# Altium PCB Trigger.PcbDoc (part 2 of 3)
Units mil, origin at the board's own origin, x right, y up, seen from the top; angles counter-clockwise.
Board outline 9937 x 6299 mil, 4 copper layers (TopLayer, MidLayer1, MidLayer2, BottomLayer); 197 components, 279 nets, 1978 pads, 340 vias.
Unrouted connection lines stored in the file: 59.
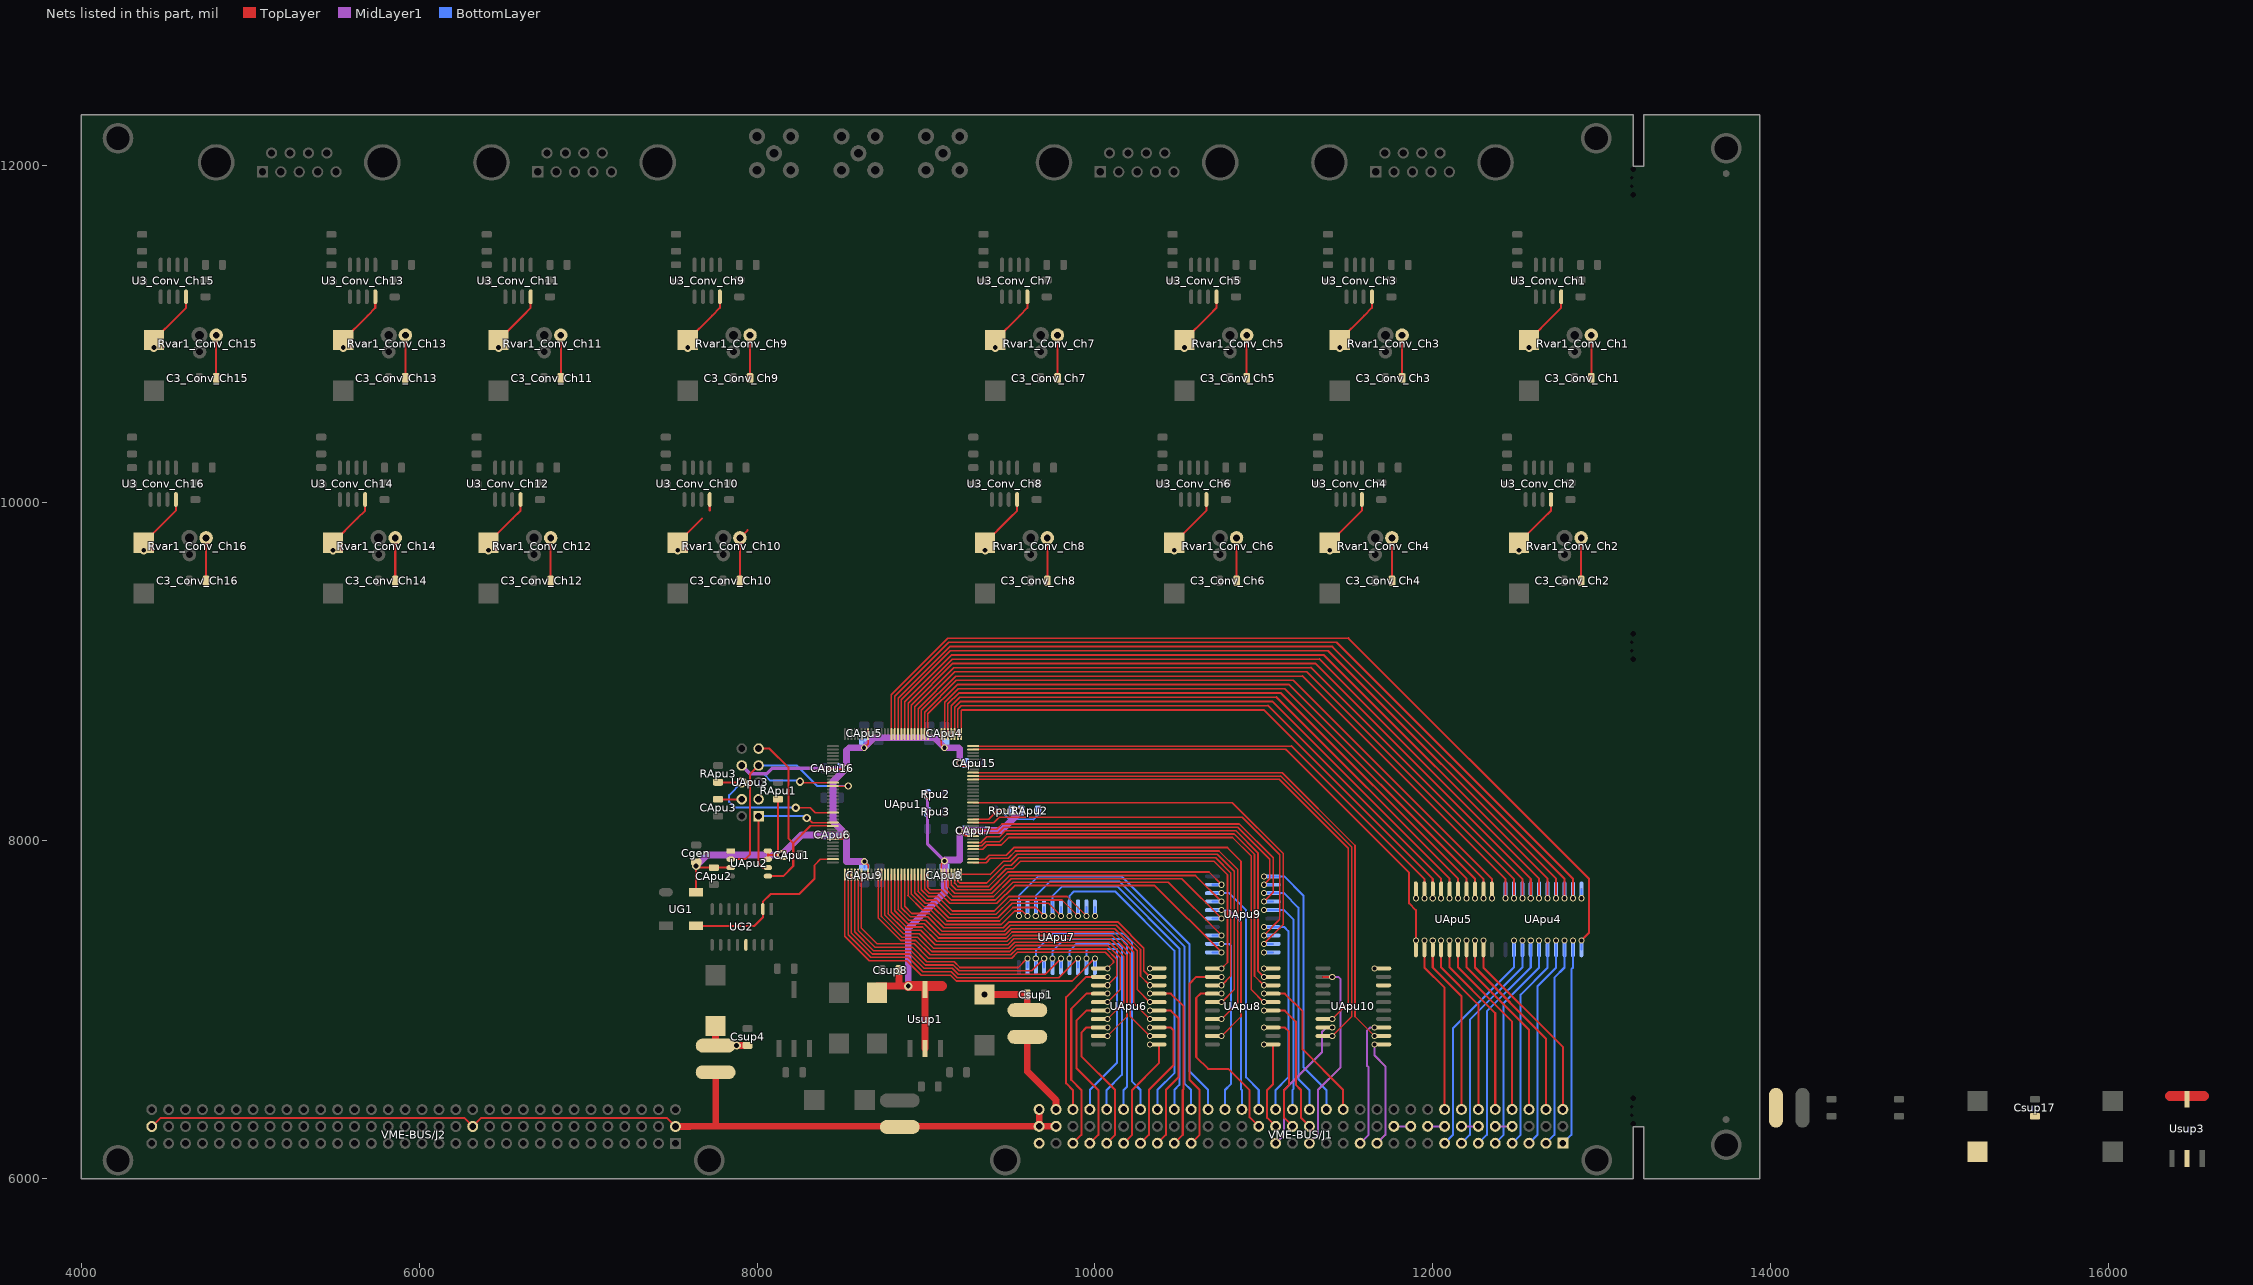
[diagram p4: the nets of this part, all layers, seen from the top]

## Via types
v1: diameter 36, hole 24, TopLayer to BottomLayer, 142 vias
v2: diameter 46, hole 32, TopLayer to BottomLayer, 64 vias
v3: diameter 50, hole 28, TopLayer to BottomLayer, 53 vias
v4: diameter 80, hole 48, TopLayer to BottomLayer, 27 vias
v5: diameter 56, hole 32, TopLayer to BottomLayer, 25 vias
v6: diameter 40, hole 24, TopLayer to BottomLayer, 18 vias
v7: diameter 64, hole 40, TopLayer to BottomLayer, 8 vias
v8: diameter 42, hole 28, TopLayer to BottomLayer, 2 vias
v9: diameter 54, hole 36, TopLayer to BottomLayer, 1 vias

## Nets (pads, with @x,y where several pads share a name; then routed paths per layer and width w, separated by ;. In a path a pad name is that pad's centre, name@x,y a point inside that pad or via, vN(x,y) a via of type N, cw(c..) or ccw(c..) an arc to the next point about the centre after c; other vN are vias at no path point) (continued)
"+3.3 V": C3_Conv_Ch1.2 C3_Conv_Ch2.2 C3_Conv_Ch3.2 C3_Conv_Ch4.2 C3_Conv_Ch5.2 C3_Conv_Ch6.2 C3_Conv_Ch7.2 C3_Conv_Ch8.2 C3_Conv_Ch9.2 C3_Conv_Ch10.2 C3_Conv_Ch11.2 C3_Conv_Ch12.2 C3_Conv_Ch13.2 C3_Conv_Ch14.2 C3_Conv_Ch15.2 C3_Conv_Ch16.2 C4_Conv_Ch1.+ C4_Conv_Ch2.+ C4_Conv_Ch3.+ C4_Conv_Ch4.+ C4_Conv_Ch5.+ C4_Conv_Ch6.+ C4_Conv_Ch7.+ C4_Conv_Ch8.+ C4_Conv_Ch9.+ C4_Conv_Ch10.+ C4_Conv_Ch11.+ C4_Conv_Ch12.+ C4_Conv_Ch13.+ C4_Conv_Ch14.+ C4_Conv_Ch15.+ C4_Conv_Ch16.+ Csup16.+ Csup17.1 Rvar1_Conv_Ch1.2 Rvar1_Conv_Ch2.2 Rvar1_Conv_Ch3.2 Rvar1_Conv_Ch4.2 Rvar1_Conv_Ch5.2 Rvar1_Conv_Ch6.2 Rvar1_Conv_Ch7.2 Rvar1_Conv_Ch8.2 Rvar1_Conv_Ch9.2 Rvar1_Conv_Ch10.2 Rvar1_Conv_Ch11.2 Rvar1_Conv_Ch12.2 Rvar1_Conv_Ch13.2 Rvar1_Conv_Ch14.2 Rvar1_Conv_Ch15.2 Rvar1_Conv_Ch16.2 U3_Conv_Ch1.8 U3_Conv_Ch2.8 U3_Conv_Ch3.8 U3_Conv_Ch4.8 U3_Conv_Ch5.8 U3_Conv_Ch6.8 U3_Conv_Ch7.8 U3_Conv_Ch8.8 U3_Conv_Ch9.8 U3_Conv_Ch10.8 U3_Conv_Ch11.8 U3_Conv_Ch12.8 U3_Conv_Ch13.8 U3_Conv_Ch14.8 U3_Conv_Ch15.8 U3_Conv_Ch16.8 Usup3.2 Usup3.4 | length 9391
  TopLayer w12: C4_Conv_Ch16.+@4370,9764.49 4514.49,9908.98 4560,9954.49 U3_Conv_Ch16.8@4560,10020.51 ; C4_Conv_Ch15.+@4430,10964.49 4574.49,11108.98 4620,11154.49 U3_Conv_Ch15.8@4620,11220.51 ; C3_Conv_Ch16.2@4738.43,9539.45 C3_Conv_Ch16.2@4738.43,9559.45 4738.43,9639.45 Rvar1_Conv_Ch16.2@4738.43,9792.91 ; C3_Conv_Ch15.2@4798.43,10739.45 C3_Conv_Ch15.2@4798.43,10759.45 4798.43,10839.45 Rvar1_Conv_Ch15.2@4798.43,10992.91 ; C4_Conv_Ch14.+@5490,9764.49 5634.49,9908.98 5680,9954.49 U3_Conv_Ch14.8@5680,10020.51 ; C4_Conv_Ch13.+@5550,10964.49 5694.49,11108.98 5740,11154.49 U3_Conv_Ch13.8@5740,11220.51 ; C3_Conv_Ch14.2@5858.43,9539.45 C3_Conv_Ch14.2@5858.43,9559.45 5858.43,9639.45 Rvar1_Conv_Ch14.2@5858.43,9792.91 ; C3_Conv_Ch13.2@5918.43,10739.45 C3_Conv_Ch13.2@5918.43,10759.45 5918.43,10839.45 Rvar1_Conv_Ch13.2@5918.43,10992.91 ; C4_Conv_Ch12.+@6410,9764.49 6554.49,9908.98 6600,9954.49 U3_Conv_Ch12.8@6600,10020.51 ; C4_Conv_Ch11.+@6470,10964.49 6614.49,11108.98 6660,11154.49 U3_Conv_Ch11.8@6660,11220.51 ; C3_Conv_Ch12.2@6778.43,9539.45 C3_Conv_Ch12.2@6778.43,9559.45 6778.43,9639.45 Rvar1_Conv_Ch12.2@6778.43,9792.91 ; C3_Conv_Ch11.2@6838.43,10739.45 C3_Conv_Ch11.2@6838.43,10759.45 6838.43,10839.45 Rvar1_Conv_Ch11.2@6838.43,10992.91 ; C4_Conv_Ch10.+@7530,9764.49 7674.49,9908.98 ; C4_Conv_Ch9.+@7590,10964.49 7734.49,11108.98 7780,11154.49 U3_Conv_Ch9.8@7780,11220.51 ; 7720,9954.49 U3_Conv_Ch10.8@7720,10020.51 ; C3_Conv_Ch10.2@7898.43,9539.45 C3_Conv_Ch10.2@7898.43,9559.45 7898.43,9639.45 Rvar1_Conv_Ch10.2@7898.43,9792.91 7943.94,9838.43 ; C3_Conv_Ch9.2@7958.43,10739.45 C3_Conv_Ch9.2@7958.43,10759.45 7958.43,10839.45 Rvar1_Conv_Ch9.2@7958.43,10992.91 ; C4_Conv_Ch8.+@9350,9764.49 9494.49,9908.98 9540,9954.49 U3_Conv_Ch8.8@9540,10020.51 ; C4_Conv_Ch7.+@9410,10964.49 9554.49,11108.98 9600,11154.49 U3_Conv_Ch7.8@9600,11220.51 ; C3_Conv_Ch8.2@9718.43,9539.45 C3_Conv_Ch8.2@9718.43,9559.45 9718.43,9639.45 Rvar1_Conv_Ch8.2@9718.43,9792.91 ; C3_Conv_Ch7.2@9778.43,10739.45 C3_Conv_Ch7.2@9778.43,10759.45 9778.43,10839.45 Rvar1_Conv_Ch7.2@9778.43,10992.91 ; C4_Conv_Ch6.+@10470,9764.49 10614.49,9908.98 10660,9954.49 U3_Conv_Ch6.8@10660,10020.51 ; C4_Conv_Ch5.+@10530,10964.49 10674.49,11108.98 10720,11154.49 U3_Conv_Ch5.8@10720,11220.51 ; C3_Conv_Ch6.2@10838.43,9539.45 C3_Conv_Ch6.2@10838.43,9559.45 10838.43,9639.45 Rvar1_Conv_Ch6.2@10838.43,9792.91 ; C3_Conv_Ch5.2@10898.43,10739.45 C3_Conv_Ch5.2@10898.43,10759.45 10898.43,10839.45 Rvar1_Conv_Ch5.2@10898.43,10992.91 ; C4_Conv_Ch4.+@11390,9764.49 11534.49,9908.98 11580,9954.49 U3_Conv_Ch4.8@11580,10020.51 ; C4_Conv_Ch3.+@11450,10964.49 11594.49,11108.98 11640,11154.49 U3_Conv_Ch3.8@11640,11220.51 ; C3_Conv_Ch4.2@11758.43,9539.45 C3_Conv_Ch4.2@11758.43,9559.45 11758.43,9639.45 Rvar1_Conv_Ch4.2@11758.43,9792.91 ; C3_Conv_Ch3.2@11818.43,10739.45 C3_Conv_Ch3.2@11818.43,10759.45 11818.43,10839.45 Rvar1_Conv_Ch3.2@11818.43,10992.91 ; C4_Conv_Ch2.+@12510,9764.49 12654.49,9908.98 12700,9954.49 U3_Conv_Ch2.8@12700,10020.51 ; C4_Conv_Ch1.+@12570,10964.49 12714.49,11108.98 12760,11154.49 U3_Conv_Ch1.8@12760,11220.51 ; C3_Conv_Ch2.2@12878.43,9539.45 C3_Conv_Ch2.2@12878.43,9559.45 12878.43,9639.45 Rvar1_Conv_Ch2.2@12878.43,9792.91 ; C3_Conv_Ch1.2@12938.43,10759.45 12938.43,10839.45 Rvar1_Conv_Ch1.2@12938.43,10992.91
  other v3: 4370,9720 5490,9720 6410,9720 7530,9720 9350,9720 10470,9720 11390,9720 12510,9720 4430,10920 5550,10920 6470,10920 7590,10920 9410,10920 10530,10920 11450,10920 12570,10920
"+3.3 VDIG": CApu1.2 CApu2.2 CApu3.1 CApu4.2 CApu5.2 CApu6.2 CApu7.2 CApu8.2 CApu9.2 CApu15.2 CApu16.2 Cgen.2 Csup7.+ Csup8.1 RApu1.1 RApu2.1 Rpu1.1 Rpu2.1 Rpu3.1 UApu1.8 UApu1.29 UApu1.44 UApu1.66 UApu1.81 UApu1.102 UApu1.115 UApu1.137 UApu2.3 UApu2.7 UApu2.8 UApu3.4 UG1.4 UG2.13 Usup1.2 Usup1.4 | length 7890.9
  TopLayer w8: UApu1.29@8448.94,8009.33 8504.33,8009.33 v6(8530,8035) ; UApu1.8@8448.94,8422.72 v6@8522.72,8422.72 ; v6(8634.29,8551.02) 8657.6,8574.33 UApu1.137@8657.6,8631.38 ; v6(8635.1,7878.17) 8657.6,7855.67 UApu1.44@8657.6,7800.67 ; UApu1.66@9090.67,7800.67 9090.67,7862.4 v6(9109.29,7881.02) ; UApu1.115@9090.67,8631.38 9090.67,8569.65 v6(9109.29,8551.02) ; v6(9199.29,8061.02) 9231.3,8029.02 UApu1.81@9279.65,8029.02 ; v6(9200,8460) 9217.6,8442.4 UApu1.102@9279.65,8442.4
  TopLayer w12: Cgen.2@7629.29,7861.02 v3(7639.29,7851.02) v3@7640,7850.31 ; UG1.4@7640,7696.02 v3@7640,7850.31 ; v3@7640,7851.02 v3@7640,7850.31 ; CApu3.1@7769.29,8246.02 UApu3.4@7909.29,8246.02 ; UApu2.3@7844.29,7841.02 CApu2.2@7744.29,7841.02 CApu2.2@7724.29,7841.02 7649.29,7841.02 v3@7640,7850.31 ; UApu2.7@8064.29,7891.02 8064.29,7916.02 ; UApu2.8@8064.29,7941.02 8064.29,7916.02 ; RApu1.1@8124.29,8246.02 RApu1.1@8124.29,8236.02 8124.29,7936.02 v3(8144.29,7916.02) 8064.29,7916.02
  TopLayer w40: Csup7.+@8710,7140 8840,7140 ; Csup8.1@8840,7235 Csup8.1@8840,7215 8840,7140 ; v3(8895,7140) 8840,7140 ; Usup1.2@8995,6770 Usup1.4@8995,7120
  MidLayer1 w20: 7909.29,8446.02 7958.29,8397.02 8057.02,8397.02 8090,8430 v6(8530,8430) ; v6(9009.29,8265) 9009.29,7981.02 v6(9109.29,7881.02)
  MidLayer1 w40: v3(7639.29,7851.02) 7704.29,7916.02 v3(8144.29,7916.02) 8263.27,8035 v6(8530,8035) ; v6(8635.1,7878.17) 8530,7878.17 v6(8530,8035) ; v3(8895,7140) 8895,7480 9109.29,7694.29 v6(9109.29,7881.02) ; v6@9109.13,8550.87 9194.13,8550.87 9200,8545 v6(9200,8460) ; v6(9109.29,8551.02) 9050.31,8610 8693.27,8610 v6(8634.29,8551.02) 8546.02,8551.02 8530,8535 v6(8530,8430) 8450,8350 8450,8115 v6(8530,8035) ; v6@9114.69,7886.43 9199.29,7886.43 v6(9199.29,8061.02) 9446.02,8061.02 9538.9,8153.9 v8(9538.9,8178.9)
  BottomLayer w10: Rpu1.1@9518.9,8178.9 RApu2.1@9563.9,8178.9
  BottomLayer w12: CApu6.2@8495,8035 v6(8530,8035) ; CApu16.2@8495,8430 v6(8530,8430) ; v6(8634.29,8551.02) CApu5.2@8634.29,8586.02 ; CApu9.2@8635.1,7843.17 v6(8635.1,7878.17) ; Rpu3.1@9009.29,8171.02 Rpu2.1@9009.29,8276.02 ; CApu8.2@9109.29,7846.02 v6(9109.29,7881.02) ; v6(9199.29,8061.02) CApu7.2@9234.29,8061.02 ; v6(9200,8460) CApu15.2@9235,8460
"+5 V": Csup3.+ Csup4.1 Lref2.2 UApu4.20 UApu5.20 UApu6.20 UApu7.20 UApu8.20 UApu9.20 UApu10.20 | length 684.3
  TopLayer w12: v1(10325,7245) UApu6.20@10379.13,7245 ; v1(11000,7245) UApu8.20@11054.13,7245 ; v1(11655,7245) UApu10.20@11709.13,7245 ; v1(11900,7660) UApu5.20@11900,7714.13
  TopLayer w40: Csup3.+@7753.93,6903.93 7753.93,6788.55 Csup4.1@7943.93,6788.55
  BottomLayer w12: v1(10000,7554.13) UApu7.20@10000,7608.27 ; v1(11000,7340) UApu9.20@11054.13,7340 ; v1(12880,7660) UApu4.20@12880,7714.13
  other v3: 7878.93,6788.55
"+5IN V": Lref2.1 Lref3.1 Lref4.1 VME-BUS/J1.A32 VME-BUS/J1.B31 VME-BUS/J1.B32 VME-BUS/J1.C32 VME-BUS/J2.B1 VME-BUS/J2.B13 VME-BUS/J2.B32 | length 5858.3
  TopLayer w12: VME-BUS/J2.B32@4417,6307 4470,6360 6266,6360 VME-BUS/J2.B13@6317,6309 6368,6360 7466,6360 VME-BUS/J2.B1@7517,6309
  TopLayer w40: VME-BUS/J2.B1@7517,6309 7603,6309 ; 7603,6310 7755,6310 ; Lref2.1@7755,6630 7755,6310 ; VME-BUS/J1.C32@9670,6410 VME-BUS/J1.B32@9670,6310 ; VME-BUS/J1.B31@9770,6310 VME-BUS/J1.B32@9670,6310 ; 7755,6310 8850,6310 VME-BUS/J1.B32@9670,6310
"+12 V": Csup1.1 Csup2.+ Lref1.2 | length 346.3
  TopLayer w40: v9(9346.52,7090.26) Csup1.1@9600,7090.26 Lref1.2@9600,6997.48
"+12IN V": Lref1.1 VME-BUS/J1.C31 | length 500.4
  TopLayer w40: Lref1.1@9600,6840 9600,6635 9770,6465 VME-BUS/J1.C31@9770,6410
A01: UApu6.4 VME-BUS/J1.A30 | length 1092.8
  TopLayer w12: VME-BUS/J1.A30@9870,6210 9920,6260 9920,6525 9860,6585 9860,7005 9950,7095 UApu6.4@10020.87,7095 v1(10075,7095)
A02: UApu6.6 VME-BUS/J1.A29 | length 1009.4
  TopLayer w12: VME-BUS/J1.A29@9970,6210 10020,6260 10020,6525 9890,6655 9890,6935 9950,6995 UApu6.6@10020.87,6995 v1(10075,6995)
A03: UApu6.8 VME-BUS/J1.A28 | length 926
  TopLayer w12: VME-BUS/J1.A28@10070,6210 10120,6260 10120,6525 9920,6725 9920,6865 9950,6895 UApu6.8@10020.87,6895 v1(10075,6895)
A04: UApu6.11 VME-BUS/J1.A27 | length 725.8
  TopLayer w12: VME-BUS/J1.A27@10170,6210 10220,6260 10220,6525 10379.13,6684.13 UApu6.11@10379.13,6795 v1(10325,6795)
A05: UApu6.13 VME-BUS/J1.A26 | length 897
  TopLayer w12: VME-BUS/J1.A26@10270,6210 10320,6260 10320,6525 10465,6670 10465,6880 10450,6895 UApu6.13@10379.13,6895 v1(10325,6895)
A06: UApu6.15 VME-BUS/J1.A25 | length 980.4
  TopLayer w12: v1(10325,6995) UApu6.15@10379.13,6995 10450,6995 10495,6950 10495,6600 10420,6525 10420,6260 VME-BUS/J1.A25@10370,6210
A07: UApu6.17 VME-BUS/J1.A24 | length 1063.8
  TopLayer w12: v1(10325,7095) UApu6.17@10379.13,7095 10450,7095 10525,7020 10525,6530 10520,6525 10520,6260 VME-BUS/J1.A24@10470,6210
A08: UApu6.2 VME-BUS/J1.C30 | length 976.3
  TopLayer w12: VME-BUS/J1.C30@9870,6410 9870,6525 9830,6565 9830,7075 9950,7195 UApu6.2@10020.87,7195 v1(10075,7195)
A09: UApu7.2 VME-BUS/J1.C29 | length 1300.1
  BottomLayer w12: UApu7.2@9950,7250 v1(9950,7304.13) 9950,7349.13 9961.01,7360.15 10130,7360.15 10130,6685 9970,6525 VME-BUS/J1.C29@9970,6410
A10: UApu7.4 VME-BUS/J1.C28 | length 1431.7
  BottomLayer w12: UApu7.4@9850,7250 v1(9850,7304.13) 9850,7349.13 9891.01,7390.15 10139.85,7390.15 10160,7370 10160,6615 10070,6525 VME-BUS/J1.C28@10070,6410
A11: UApu7.6 VME-BUS/J1.C27 | length 1566.4
  BottomLayer w12: UApu7.6@9750,7250 v1(9750,7304.13) 9750,7349.13 9821.01,7420.15 10154.85,7420.15 10190,7385 10190,6545 10170,6525 VME-BUS/J1.C27@10170,6410
A12: UApu7.8 VME-BUS/J1.C26 | length 1742.5
  BottomLayer w12: UApu7.8@9650,7250 v1(9650,7304.13) 9650,7349.13 9751.01,7450.15 10169.85,7450.15 10220,7400 10220,6575 10270,6525 VME-BUS/J1.C26@10270,6410
A13: UApu7.17 VME-BUS/J1.C25 | length 1877.1
  BottomLayer w12: v1(9850,7554.13) UApu7.17@9850,7608.27 9850,7674.13 9875.87,7700 10120,7700 10470,7350 10470,6625 10370,6525 VME-BUS/J1.C25@10370,6410
A14: UApu7.15 VME-BUS/J1.C24 | length 2010.2
  BottomLayer w12: v1(9750,7554.13) UApu7.15@9750,7608.27 9750,7674.13 9805.87,7730 10132.43,7730 10500,7362.43 10500,6555 10470,6525 VME-BUS/J1.C24@10470,6410
A15: UApu7.13 VME-BUS/J1.C23 | length 2176.5
  BottomLayer w12: v1(9650,7554.13) UApu7.13@9650,7608.27 9650,7674.13 9735.87,7760 10144.85,7760 10530,7374.85 10530,6565 10570,6525 VME-BUS/J1.C23@10570,6410
A16: UApu7.11 VME-BUS/J1.C22 | length 2367.6
  BottomLayer w12: v1(9550,7554.13) UApu7.11@9550,7608.27 9550,7674.13 9665.87,7790 10157.28,7790 10560,7387.28 10560,6635 10670,6525 VME-BUS/J1.C22@10670,6410
A17: UApu9.2 VME-BUS/J1.C21 | length 1097.8
  BottomLayer w12: UApu9.2@10695.87,7390 v1(10750,7390) 10795,7390 10805,7380 10805,6560 10770,6525 VME-BUS/J1.C21@10770,6410
A18: UApu9.6 VME-BUS/J1.C20 | length 1310.2
  BottomLayer w12: UApu9.6@10695.87,7590 v1(10750,7590) 10795,7590 10865,7520 10865,6530 10870,6525 VME-BUS/J1.C20@10870,6410
A19: UApu9.8 VME-BUS/J1.C19 | length 1451.6
  BottomLayer w12: UApu9.8@10695.87,7690 v1(10750,7690) 10795,7690 10895,7590 10895,6600 10970,6525 VME-BUS/J1.C19@10970,6410
A20: UApu9.17 VME-BUS/J1.C18 | length 1241.4
  BottomLayer w12: v1(11000,7490) UApu9.17@11054.13,7490 11120,7490 11145,7465 11145,6600 11070,6525 VME-BUS/J1.C18@11070,6410
A21: UApu9.15 VME-BUS/J1.C17 | length 1324.9
  BottomLayer w12: v1(11000,7590) UApu9.15@11054.13,7590 11120,7590 11175,7535 11175,6530 11170,6525 VME-BUS/J1.C17@11170,6410
A22: UApu9.13 VME-BUS/J1.C16 | length 1462.1
  BottomLayer w12: v1(11000,7690) UApu9.13@11054.13,7690 11120,7690 11205,7605 11205,6590 11270,6525 VME-BUS/J1.C16@11270,6410
A23: UApu9.11 VME-BUS/J1.C15 | length 1603.6
  BottomLayer w12: v1(11000,7790) UApu9.11@11054.13,7790 11120,7790 11235,7675 11235,6660 11370,6525 VME-BUS/J1.C15@11370,6410
AM0: UApu8.15 VME-BUS/J1.B16 | length 870.1
  TopLayer w12: v1(11000,6995) UApu8.15@11054.13,6995 11125,6995 11190,6930 11190,6555 11220,6525 11220,6360 VME-BUS/J1.B16@11270,6310
AM1: UApu8.13 VME-BUS/J1.B17 | length 753.5
  TopLayer w12: v1(11000,6895) UApu8.13@11054.13,6895 11125,6895 11150,6870 11150,6555 11120,6525 11120,6360 VME-BUS/J1.B17@11170,6310
AM2: UApu8.11 VME-BUS/J1.B18 | length 574
  TopLayer w12: v1(11000,6795) UApu8.11@11054.13,6795 11054.13,6559.13 11020,6525 11020,6360 VME-BUS/J1.B18@11070,6310
AM3: UApu8.4 VME-BUS/J1.B19 | length 1123
  TopLayer w12: UApu8.4@10675,7095 10625,7095 10600,7070 10600,6720 10670,6650 10790,6650 10916.48,6523.52 10916.48,6363.52 VME-BUS/J1.B19@10970,6310 ; UApu8.4@10695.87,7095 v1(10750,7095)
AM4: UApu8.2 VME-BUS/J1.A23 | length 1176.3
  TopLayer w12: VME-BUS/J1.A23@10570,6210 10620,6260 10620,6525 10560,6585 10560,7155 10600,7195 UApu8.2@10675,7195 ; UApu8.2@10695.87,7195 v1(10750,7195)
AM5: UApu8.17 VME-BUS/J1.C14 | length 952.9
  TopLayer w12: v1(11000,7095) UApu8.17@11054.13,7095 11125,7095 11230,6990 11230,6765 11470,6525 VME-BUS/J1.C14@11470,6410
AMOE_1: UApu1.70 UApu8.1 | length 2393.1
  TopLayer w8: 9169.41,7750.59 UApu1.70@9169.41,7800.67
  TopLayer w10: 9169.41,7750.59 9190,7730 9370,7730 9475,7835 9515,7835 9560,7880 10705,7880 10785,7800 10785,7280 v1(10750,7245)
  TopLayer w12: UApu8.1@10695.87,7245 v1(10750,7245)
AMOE_2: UApu1.79 UApu8.19 | length 2572
  TopLayer w8: UApu1.79@9279.65,7989.65 9324.65,7989.65 9360,8025
  TopLayer w10: 9360,8025 9435,8025 9470,8060 10835,8060 10965,7930 10965,7230 v1(11000,7195)
  TopLayer w12: v1(11000,7195) UApu8.19@11054.13,7195
AMPL0: UApu1.72 UApu8.5 | length 2567.3
  TopLayer w8: UApu1.72@9208.78,7800.67 9380.67,7800.67
  TopLayer w10: 9380.67,7800.67 9459,7879 9499,7879 9540,7920 10725,7920 10825,7820 10825,7120 v1(10750,7045)
  TopLayer w12: UApu8.5@10695.87,7045 v1(10750,7045)
AMPL1: UApu1.73 UApu8.7 | length 2617.8
  TopLayer w8: UApu1.73@9279.65,7871.54 9356.54,7871.54 9382,7897
  TopLayer w10: 9382,7897 9487,7897 9530,7940 10735,7940 10845,7830 10845,7040 v1(10750,6945)
  TopLayer w12: UApu8.7@10695.87,6945 v1(10750,6945)
AMPL2: UApu1.74 UApu8.9 | length 2783.7
  TopLayer w8: UApu1.74@9279.65,7891.22 9351.22,7891.22 9375,7915
  TopLayer w10: 9375,7915 9475,7915 9520,7960 10785,7960 10865,7880 10865,6960 v1(10750,6845)
  TopLayer w12: UApu8.9@10695.87,6845 v1(10750,6845)
AMPL3: UApu1.77 UApu8.16 | length 2670
  TopLayer w8: UApu1.77@9279.65,7950.28 9335.28,7950.28 9360,7975
  TopLayer w10: 9360,7975 9445,7975 9490,8020 10815,8020 10925,7910 10925,7120 v1(11000,7045)
  TopLayer w12: v1(11000,7045) UApu8.16@11054.13,7045
AMPL4: UApu1.78 UApu8.18 | length 2596
  TopLayer w8: UApu1.78@9279.65,7969.96 9329.96,7969.96 9355,7995
  TopLayer w10: 9355,7995 9435,7995 9480,8040 10825,8040 10945,7920 10945,7200 v1(11000,7145)
  TopLayer w12: v1(11000,7145) UApu8.18@11054.13,7145
AMPL5: UApu1.71 UApu8.3 | length 2501.5
  TopLayer w8: 9189.09,7760.91 UApu1.71@9189.09,7800.67
  TopLayer w10: 9189.09,7760.91 9200,7750 9360,7750 9465,7855 9505,7855 9550,7900 10715,7900 10805,7810 10805,7200 v1(10750,7145)
  TopLayer w12: UApu8.3@10695.87,7145 v1(10750,7145)
AOE_1: UApu1.42 UApu6.1 | length 2033
  TopLayer w8: 8618.23,7481.77 UApu1.42@8618.23,7800.67
  TopLayer w10: 8618.23,7481.77 8710,7390 8930,7390 9015,7305 9507.03,7305 9542.03,7340 10007.97,7340 10060.44,7340 10110,7290.44 10110,7280 v1(10075,7245)
  TopLayer w12: UApu6.1@10020.87,7245 v1(10075,7245)
AOE_2: UApu1.55 UApu6.19 | length 1974.4
  TopLayer w8: 8874.13,7612.14 UApu1.55@8874.13,7800.67
  TopLayer w10: 8874.13,7612.14 8916.27,7570 9019.69,7570 9104.69,7485 9457.92,7485 9492.92,7520 10135,7520 10290,7365 10290,7230 v1(10325,7195)
  TopLayer w12: v1(10325,7195) UApu6.19@10379.13,7195
AOE_3: UApu1.37 UApu7.1 | length 2065.2
  TopLayer w8: 8519.8,7435.2 UApu1.37@8519.8,7800.67
  TopLayer w10: 8519.8,7435.2 8665,7290 8886.86,7290 8971.86,7205 9145,7205 9180,7170 9865.87,7170 v1(10000,7304.13)
  BottomLayer w12: UApu7.1@10000,7250 v1(10000,7304.13)
AOE_4: UApu1.60 UApu7.19 | length 1257.1
  TopLayer w8: 8972.56,7710.58 UApu1.60@8972.56,7800.67
  TopLayer w10: 8972.56,7710.58 9013.14,7670 9070,7670 9155,7585 9405,7585 9490,7670 9835,7670 v1@9950.43,7554.57
  BottomLayer w12: v1(9950,7554.13) UApu7.19@9950,7608.27
AOE_5: UApu1.61 UApu9.1 | length 2138.5
  TopLayer w8: 8992.24,7717.3 UApu1.61@8992.24,7800.67
  TopLayer w10: 8992.24,7717.3 9019.54,7690 9080,7690 9140,7630 9420,7630 9525,7735 9565,7735 10355,7735 v1(10750,7340)
  BottomLayer w12: UApu9.1@10695.87,7340 v1(10750,7340)
AOE_6: UApu1.91 UApu9.19 | length 2596.7
  TopLayer w8: UApu1.91@9279.65,8225.87 10813.99,8225.87
  TopLayer w10: 10813.99,8225.87 11115,7924.85 11115,7505 v1(11000,7390)
  BottomLayer w12: v1(11000,7390) UApu9.19@11054.13,7390
APL01: UApu1.53 UApu6.16 | length 2140.7
  TopLayer w8: 8834.76,7594.94 UApu1.53@8834.76,7800.67
  TopLayer w10: 8834.76,7594.94 8899.71,7530 8999.69,7530 9084.69,7445 9468.83,7445 9503.83,7480 10118.43,7480 10250,7348.43 10250,7120 v1(10325,7045)
  TopLayer w12: v1(10325,7045) UApu6.16@10379.13,7045
APL02: UApu1.52 UApu6.14 | length 2248.9
  TopLayer w8: 8815.08,7586.34 UApu1.52@8815.08,7800.67
  TopLayer w10: 8815.08,7586.34 8891.42,7510 8989.69,7510 9074.69,7425 9474.29,7425 9509.29,7460 10110.15,7460 10230,7340.15 10230,7040 v1(10325,6945)
  TopLayer w12: v1(10325,6945) UApu6.14@10379.13,6945
APL03: UApu1.51 UApu6.12 | length 2357
  TopLayer w8: 8795.39,7577.74 UApu1.51@8795.39,7800.67
  TopLayer w10: 8795.39,7577.74 8883.14,7490 8979.69,7490 9064.69,7405 9479.75,7405 9514.75,7440 10101.86,7440 10210,7331.86 10210,6960 v1(10325,6845)
  TopLayer w12: v1(10325,6845) UApu6.12@10379.13,6845
APL04: UApu1.50 UApu6.9 | length 2356.9
  TopLayer w8: 8775.71,7569.14 UApu1.50@8775.71,7800.67
  TopLayer w10: 8775.71,7569.14 8874.85,7470 8969.69,7470 9054.69,7385 9485.2,7385 9520.2,7420 10093.58,7420 10190,7323.58 10190,6960 v1(10075,6845)
  TopLayer w12: UApu6.9@10020.87,6845 v1(10075,6845)
APL05: UApu1.49 UApu6.7 | length 2248.5
  TopLayer w8: 8756.02,7560.55 UApu1.49@8756.02,7800.67
  TopLayer w10: 8756.02,7560.55 8866.57,7450 8959.69,7450 9044.69,7365 9490.66,7365 9525.66,7400 10085.29,7400 10170,7315.29 10170,7040 v1(10075,6945)
  TopLayer w12: UApu6.7@10020.87,6945 v1(10075,6945)
APL06: UApu1.48 UApu6.5 | length 2140
  TopLayer w8: 8736.34,7551.95 UApu1.48@8736.34,7800.67
  TopLayer w10: 8736.34,7551.95 8858.28,7430 8949.69,7430 9034.69,7345 9496.11,7345 9531.11,7380 10077.01,7380 10150,7307.01 10150,7120 v1(10075,7045)
  TopLayer w12: UApu6.5@10020.87,7045 v1(10075,7045)
APL07: UApu1.47 UApu6.3 | length 2031.6
  TopLayer w8: 8716.65,7543.35 UApu1.47@8716.65,7800.67
  TopLayer w10: 8716.65,7543.35 8850,7410 8939.69,7410 9024.69,7325 9501.57,7325 9536.57,7360 10068.73,7360 10130,7298.73 10130,7200 v1(10075,7145)
  TopLayer w12: UApu6.3@10020.87,7145 v1(10075,7145)
APL08: UApu1.54 UApu6.18 | length 2032.5
  TopLayer w8: 8854.45,7603.54 UApu1.54@8854.45,7800.67
  TopLayer w10: 8854.45,7603.54 8907.99,7550 9009.69,7550 9094.69,7465 9463.38,7465 9498.38,7500 10126.72,7500 10270,7356.72 10270,7200 v1(10325,7145)
  TopLayer w12: v1(10325,7145) UApu6.18@10379.13,7145
APL09: UApu1.59 UApu7.18 | length 1231.9
  TopLayer w8: 8952.87,7701.98 UApu1.59@8952.87,7800.67
  TopLayer w10: 8952.87,7701.98 9004.85,7650 9060,7650 9145,7565 9415,7565 9500,7650 9805,7650 v1@9900.43,7554.57
  BottomLayer w12: v1(9900,7554.13) UApu7.18@9900,7608.27
APL10: UApu1.58 UApu7.16 | length 1156.6
  TopLayer w8: 8933.19,7693.38 UApu1.58@8933.19,7800.67
  TopLayer w10: 8933.19,7693.38 8996.57,7630 9050,7630 9135,7545 9425,7545 9510,7630 9725,7630 v1@9800.43,7554.57
  BottomLayer w12: v1(9800,7554.13) UApu7.16@9800,7608.27
APL11: UApu1.57 UApu7.14 | length 1077.2
  TopLayer w8: 8913.5,7684.78 UApu1.57@8913.5,7800.67
  TopLayer w10: 8913.5,7684.78 8988.28,7610 9040,7610 9125,7525 9435,7525 9515,7605 9650,7605 v1@9700.43,7554.57
  BottomLayer w12: v1(9700,7554.13) UApu7.14@9700,7608.27
APL12: UApu1.56 UApu7.12 | length 1002
  TopLayer w8: 8893.82,7676.18 UApu1.56@8893.82,7800.67
  TopLayer w10: 8893.82,7676.18 8980,7590 9029.69,7590 9114.69,7505 9445,7505 9525,7585 9537.03,7585 9537.16,7585.13 9562.84,7585.13 9562.97,7585 9570,7585 v1@9600.43,7554.57
  BottomLayer w12: v1(9600,7554.13) UApu7.12@9600,7608.27
APL13: UApu1.38 UApu7.3 | length 1923.9
  TopLayer w8: 8539.49,7443.8 UApu1.38@8539.49,7800.67
  TopLayer w10: 8539.49,7443.8 8673.28,7310 8895.15,7310 8980.15,7225 9150.46,7225 9185.46,7190 9785.87,7190 v1(9900,7304.13)
  BottomLayer w12: UApu7.3@9900,7250 v1(9900,7304.13)
APL14: UApu1.39 UApu7.5 | length 1782.6
  TopLayer w8: 8559.17,7452.4 UApu1.39@8559.17,7800.67
  TopLayer w10: 8559.17,7452.4 8681.57,7330 8903.43,7330 8988.43,7245 9155.91,7245 9190.91,7210 9705.87,7210 v1(9800,7304.13)
  BottomLayer w12: UApu7.5@9800,7250 v1(9800,7304.13)
APL15: UApu1.40 UApu7.7 | length 1641.3
  TopLayer w8: 8578.86,7460.99 UApu1.40@8578.86,7800.67
  TopLayer w10: 8578.86,7460.99 8689.85,7350 8911.72,7350 8996.72,7265 9161.37,7265 9196.37,7230 9625.87,7230 v1(9700,7304.13)
  BottomLayer w12: UApu7.7@9700,7250 v1(9700,7304.13)
APL16: UApu1.41 UApu7.9 | length 1500
  TopLayer w8: 8598.54,7469.59 UApu1.41@8598.54,7800.67
  TopLayer w10: 8598.54,7469.59 8698.14,7370 8920,7370 9005,7285 9166.82,7285 9201.82,7250 9545.87,7250 v1(9600,7304.13)
  BottomLayer w12: UApu7.9@9600,7250 v1(9600,7304.13)
APL17: UApu1.85 UApu9.18 | length 2491.3
  TopLayer w8: UApu1.85@9279.65,8107.76 9401.93,8107.76 9434.17,8140
  TopLayer w10: 9434.17,8140 10871.57,8140 11095,7916.57 11095,7535 v1(11000,7440)
  BottomLayer w12: v1(11000,7440) UApu9.18@11054.13,7440
APL18: UApu1.83 UApu9.14 | length 2208.2
  TopLayer w8: UApu1.83@9279.65,8068.39 9351.3,8068.39
  TopLayer w10: 9351.3,8068.39 9418.39,8068.39 9450,8100 10855,8100 11055,7900 11055,7695 v1(11000,7640)
  BottomLayer w12: v1(11000,7640) UApu9.14@11054.13,7640
APL19: UApu1.82 UApu9.12 | length 2065.7
  TopLayer w8: UApu1.82@9279.65,8048.7 9331.3,8048.7
  TopLayer w10: 9331.3,8048.7 9428.7,8048.7 9460,8080 10845,8080 11035,7890 11035,7775 v1(11000,7740)
  BottomLayer w12: v1(11000,7740) UApu9.12@11054.13,7740
APL20: UApu1.62 UApu9.3 | length 2074
  TopLayer w8: 9011.93,7723.07 UApu1.62@9011.93,7800.67
  TopLayer w10: 9011.93,7723.07 9025,7710 9090,7710 9150,7650 9410,7650 9515,7755 9555,7755 10435,7755 v1(10750,7440)
  BottomLayer w12: UApu9.3@10695.87,7440 v1(10750,7440)
APL21: UApu1.67 UApu9.5 | length 1936.2
  TopLayer w8: 9110.35,7719.65 UApu1.67@9110.35,7800.67
  TopLayer w10: 9110.35,7719.65 9160,7670 9400,7670 9505,7775 9545,7775 10515,7775 v1(10750,7540)
  BottomLayer w12: UApu9.5@10695.87,7540 v1(10750,7540)
APL22: UApu1.68 UApu9.7 | length 1869.1
  TopLayer w10: UApu1.68@9130.04,7800.67 9130.04,7729.96 9170,7690 9390,7690 9495,7795 9535,7795 10595,7795 v1(10750,7640)
  BottomLayer w12: UApu9.7@10695.87,7640 v1(10750,7640)
APL23: UApu1.69 UApu9.9 | length 1801.9
  TopLayer w10: UApu1.69@9149.72,7800.67 9149.72,7740.28 9180,7710 9380,7710 9485,7815 9525,7815 10675,7815 v1(10750,7740)
  BottomLayer w12: UApu9.9@10695.87,7740 v1(10750,7740)
AS: UApu10.8 VME-BUS/J1.A18 | length 898.4
  TopLayer w12: UApu10.8@11350.87,6895 v1(11405,6895)
  MidLayer1 w12: VME-BUS/J1.A18@11070,6210 11120,6260 11120,6525 11345,6750 11345,6870 11370,6895 v1(11405,6895)
"AS ASD": UApu1.25 UApu2.5 UApu3.9 | length 1269.6
  TopLayer w8: 8316.34,8088.07 UApu1.25@8448.94,8088.07
  TopLayer w12: UApu3.9@8009.29,8546.02 8073.98,8546.02 8185,8435 8185,8015.31 8214.29,7986.02 ; UApu2.5@8064.29,7791.02 8154.29,7791.02 8214.29,7851.02 8214.29,7986.02 ; 8316.34,8088.07 8214.29,7986.02
"AS DATA": UApu1.13 UApu2.2 UApu3.7 | length 1344.7
  TopLayer w8: UApu1.13@8448.94,8324.29 v8@8540,8324.29
  TopLayer w12: UApu2.2@7844.29,7891.02 7929.29,7891.02 7959.29,7921.02 7959.29,8396.73 ; 7960,8396.73 UApu3.7@8009.29,8446.02
  BottomLayer w12: UApu3.7@8009.29,8446.02 8233.98,8446.02 8355,8325 v8(8540,8325)
"AS DCLK": UApu1.24 UApu2.6 UApu3.1 | length 795.4
  TopLayer w8: 8327.45,8107.76 UApu1.24@8448.94,8107.76
  TopLayer w12: UApu3.1@8009.29,8146.02 8009.29,7865.71 8033.98,7841.02 UApu2.6@8064.29,7841.02 ; v3@8300.52,8135 8327.45,8108.07
  BottomLayer w12: UApu3.1@8009.29,8146.02 8283.98,8146.02 v3(8295,8135)
"AS NCE": RApu3.1 UApu1.21 UApu3.6 | length 927.3
  TopLayer w8: v3(8229.29,8196.02) 8315.79,8196.02 8345,8166.81 UApu1.21@8448.94,8166.81
  TopLayer w12: RApu3.1@7769.29,8346.02 RApu3.1@7789.29,8346.02 UApu3.6@7909.29,8346.02
  BottomLayer w12: UApu3.6@7909.29,8346.02 7834.29,8271.02 7834.29,8231.02 7869.29,8196.02 v3(8229.29,8196.02)
"AS NCS": UApu1.12 UApu2.1 UApu3.8 | length 574.8
  TopLayer w8: v3@8261.34,8343.98 UApu1.12@8448.94,8343.98
  TopLayer w12: v3(8254.29,8351.02) v3@8261.34,8343.98
  BottomLayer w12: UApu3.8@7909.29,8446.02 7959.29,8396.02 8039.29,8396.02 8079.29,8356.02 v3@8249.29,8356.02
ASPL: UApu1.100 UApu10.12 | length 3667.6
  TopLayer w8: UApu1.100@9279.65,8403.03 11108.83,8403.03
  TopLayer w10: 11108.83,8403.03 11540,7971.86 11540,6960 v1(11655,6845)
  TopLayer w12: v1(11655,6845) UApu10.12@11709.13,6845
BG0IN*: VME-BUS/J1.B4 VME-BUS/J1.B5 | length 100
  MidLayer1 w12: VME-BUS/J1.B5@12370,6310 VME-BUS/J1.B4@12470,6310
BG1IN*: VME-BUS/J1.B6 VME-BUS/J1.B7 | length 100
  MidLayer1 w12: VME-BUS/J1.B7@12170,6310 VME-BUS/J1.B6@12270,6310
BG2IN*: VME-BUS/J1.B8 VME-BUS/J1.B9 | length 100
  MidLayer1 w12: VME-BUS/J1.B9@11970,6310 VME-BUS/J1.B8@12070,6310
BG3IN*: VME-BUS/J1.B10 VME-BUS/J1.B11 | length 100
  MidLayer1 w12: VME-BUS/J1.B11@11770,6310 VME-BUS/J1.B10@11870,6310
CONF_DONE: RApu2.2 UApu1.86 UApu3.3 | length 482.5
  TopLayer w8: UApu1.86@9279.65,8127.44 9372.44,8127.44 9420,8175 v1(9460,8175) v1@9460,8170
  BottomLayer w8: v1@9460,8170 v1(9460,8175) 9460,8160 9492.56,8127.44 9637.44,8127.44
  BottomLayer w12: 9637.44,8127.44 9673.9,8163.9 RApu2.2@9673.9,8178.9
D00: UApu4.2 VME-BUS/J1.A1 | length 1224.9
  BottomLayer w12: VME-BUS/J1.A1@12770,6210 12820,6260 12820,6525 12820,7240 12830,7250 UApu4.2@12830,7355.87 v1(12830,7410)
D01: UApu4.3 VME-BUS/J1.A2 | length 1245.6
  BottomLayer w12: VME-BUS/J1.A2@12670,6210 12720,6260 12720,6525 12720,7190 12780,7250 UApu4.3@12780,7355.87 v1(12780,7410)
D02: UApu4.4 VME-BUS/J1.A3 | length 1266.3
  BottomLayer w12: VME-BUS/J1.A3@12570,6210 12620,6260 12620,6525 12620,7140 12730,7250 UApu4.4@12730,7355.87 v1(12730,7410)
D03: UApu4.5 VME-BUS/J1.A4 | length 1287
  BottomLayer w12: VME-BUS/J1.A4@12470,6210 12520,6260 12520,6525 12520,7090 12680,7250 UApu4.5@12680,7355.87 v1(12680,7410)
D04: UApu4.6 VME-BUS/J1.A5 | length 1307.7
  BottomLayer w12: VME-BUS/J1.A5@12370,6210 12420,6260 12420,6525 12420,7040 12630,7250 UApu4.6@12630,7355.87 v1(12630,7410)
D05: UApu4.7 VME-BUS/J1.A6 | length 1328.4
  BottomLayer w12: VME-BUS/J1.A6@12270,6210 12320,6260 12320,6525 12320,6990 12580,7250 UApu4.7@12580,7355.87 v1(12580,7410)
D06: UApu4.8 VME-BUS/J1.A7 | length 1349.1
  BottomLayer w12: VME-BUS/J1.A7@12170,6210 12220,6260 12220,6525 12220,6940 12530,7250 UApu4.8@12530,7355.87 v1(12530,7410)
D07: UApu4.9 VME-BUS/J1.A8 | length 1369.8
  BottomLayer w12: VME-BUS/J1.A8@12070,6210 12120,6260 12120,6525 12120,6890 12480,7250 UApu4.9@12480,7355.87 v1(12480,7410)
D08: UApu5.9 VME-BUS/J1.C1 | length 1194.7
  TopLayer w12: v1(12300,7410) UApu5.9@12300,7355.87 12300,7250 12770,6780 VME-BUS/J1.C1@12770,6410
D09: UApu5.8 VME-BUS/J1.C2 | length 1174
  TopLayer w12: v1(12250,7410) UApu5.8@12250,7355.87 12250,7250 12670,6830 12670,6525 VME-BUS/J1.C2@12670,6410
D10: UApu5.7 VME-BUS/J1.C3 | length 1153.3
  TopLayer w12: v1(12200,7410) UApu5.7@12200,7355.87 12200,7250 12570,6880 12570,6525 VME-BUS/J1.C3@12570,6410
D11: UApu5.6 VME-BUS/J1.C4 | length 1132.5
  TopLayer w12: v1(12150,7410) UApu5.6@12150,7355.87 12150,7250 12470,6930 12470,6525 VME-BUS/J1.C4@12470,6410
D12: UApu5.5 VME-BUS/J1.C5 | length 1111.8
  TopLayer w12: v1(12100,7410) UApu5.5@12100,7355.87 12100,7250 12370,6980 12370,6525 VME-BUS/J1.C5@12370,6410
D13: UApu5.4 VME-BUS/J1.C6 | length 1091.1
  TopLayer w12: v1(12050,7410) UApu5.4@12050,7355.87 12050,7250 12270,7030 12270,6525 VME-BUS/J1.C6@12270,6410
D14: UApu5.3 VME-BUS/J1.C7 | length 1070.4
  TopLayer w12: v1(12000,7410) UApu5.3@12000,7355.87 12000,7250 12170,7080 12170,6525 VME-BUS/J1.C7@12170,6410
D15: UApu5.2 VME-BUS/J1.C8 | length 1049.7
  TopLayer w12: v1(11950,7410) UApu5.2@11950,7355.87 11950,7250 12070,7130 12070,6525 VME-BUS/J1.C8@12070,6410
DDIR_1: UApu1.130 UApu4.1 | length 5530.2
  TopLayer w8: UApu1.130@8795.39,8631.38 8795.39,8865.39 9130,9200
  TopLayer w10: 9130,9200 11500,9200
  TopLayer w12: 11500,9200 12925,7775 12925,7455 v1(12880,7410)
  BottomLayer w12: UApu4.1@12880,7355.87 v1(12880,7410)
DDIR_2: UApu1.107 UApu5.1 | length 3353.9
  TopLayer w8: UApu1.107@9279.65,8541.05 11128.95,8541.05
  TopLayer w12: 11128.95,8541.05 11860,7810 11860,7630 11900,7590 v1(11900,7410) UApu5.1@11900,7355.87
DOE_1: UApu1.129 UApu4.19 | length 5120.2
  TopLayer w8: UApu1.129@8815.08,8631.38 8815.08,8834.76 8815.08,8855.08 9135,9175
  TopLayer w10: 9135,9175 11430,9175
  TopLayer w12: 11430,9175 12830,7775 v1(12830,7660)
  BottomLayer w12: v1(12830,7660) UApu4.19@12830,7714.13
DOE_2: UApu1.108 UApu5.19 | length 3110.8
  TopLayer w8: UApu1.108@9279.65,8560.73 11164.27,8560.73
  TopLayer w12: 11164.27,8560.73 11950,7775 UApu5.19@11950,7714.13 v1(11950,7660)
DPL00: UApu1.128 UApu4.18 | length 5023.7
  TopLayer w8: UApu1.128@8834.76,8631.38 8834.76,8824.45 8834.76,8844.76 9140,9150
  TopLayer w10: 9140,9150 11405,9150
  TopLayer w12: 11405,9150 12780,7775 v1(12780,7660)
  BottomLayer w12: v1(12780,7660) UApu4.18@12780,7714.13
DPL01: UApu1.127 UApu4.17 | length 4927.3
  TopLayer w8: UApu1.127@8854.45,8631.38 8854.45,8814.13 8854.45,8834.45 9145,9125
  TopLayer w10: 9145,9125 11380,9125
  TopLayer w12: 11380,9125 12730,7775 v1(12730,7660)
  BottomLayer w12: v1(12730,7660) UApu4.17@12730,7714.13
DPL02: UApu1.126 UApu4.16 | length 4830.9
  TopLayer w8: UApu1.126@8874.13,8631.38 8874.13,8803.82 8874.13,8824.13 9150,9100
  TopLayer w10: 9150,9100 11355,9100
  TopLayer w12: 11355,9100 12680,7775 v1(12680,7660)
  BottomLayer w12: v1(12680,7660) UApu4.16@12680,7714.13
DPL03: UApu1.125 UApu4.15 | length 4734.4
  TopLayer w8: UApu1.125@8893.82,8631.38 8893.82,8793.5 8893.82,8813.82 9155,9075
  TopLayer w10: 9155,9075 11330,9075
  TopLayer w12: 11330,9075 12630,7775 v1(12630,7660)
  BottomLayer w12: v1(12630,7660) UApu4.15@12630,7714.13
DPL04: UApu1.124 UApu4.14 | length 4638
  TopLayer w8: UApu1.124@8913.5,8631.38 8913.5,8783.19 8913.5,8803.5 9160,9050
  TopLayer w10: 9160,9050 11305,9050
  TopLayer w12: 11305,9050 12580,7775 v1(12580,7660)
  BottomLayer w12: v1(12580,7660) UApu4.14@12580,7714.13
DPL05: UApu1.123 UApu4.13 | length 4541.5
  TopLayer w8: UApu1.123@8933.19,8631.38 8933.19,8772.87 8933.19,8793.19 9165,9025
  TopLayer w10: 9165,9025 11280,9025
  TopLayer w12: 11280,9025 12530,7775 v1(12530,7660)
  BottomLayer w12: v1(12530,7660) UApu4.13@12530,7714.13
DPL06: UApu1.122 UApu4.12 | length 4445.1
  TopLayer w8: UApu1.122@8952.87,8631.38 8952.87,8762.56 8952.87,8782.87 9170,9000
  TopLayer w10: 9170,9000 11255,9000
  TopLayer w12: 11255,9000 12480,7775 v1(12480,7660)
  BottomLayer w12: v1(12480,7660) UApu4.12@12480,7714.13
DPL07: UApu1.121 UApu4.11 | length 4348.7
  TopLayer w8: UApu1.121@8972.56,8631.38 8972.56,8752.24 8972.56,8772.56 9175,8975
  TopLayer w10: 9175,8975 11230,8975
  TopLayer w12: 11230,8975 12430,7775 v1(12430,7660)
  BottomLayer w12: v1(12430,7660) UApu4.11@12430,7714.13
DPL08: UApu1.120 UApu5.11 | length 4168.1
  TopLayer w8: UApu1.120@8992.24,8631.38 8992.24,8741.93 8992.24,8762.24 9180,8950
  TopLayer w10: 9180,8950 11175,8950
  TopLayer w12: 11175,8950 12350,7775 UApu5.11@12350,7714.13 v1(12350,7660)
DPL09: UApu1.119 UApu5.12 | length 4071.7
  TopLayer w8: UApu1.119@9011.93,8631.38 9011.93,8751.93 9185,8925
  TopLayer w10: 9185,8925 11150,8925
  TopLayer w12: 11150,8925 12300,7775 UApu5.12@12300,7714.13 v1(12300,7660)
DPL10: UApu1.114 UApu5.13 | length 3942.7
  TopLayer w8: UApu1.114@9110,8631.38 9110,8820 9190,8900
  TopLayer w10: 9190,8900 11125,8900
  TopLayer w12: 11125,8900 12250,7775 UApu5.13@12250,7714.13 v1(12250,7660)
DPL11: UApu1.113 UApu5.14 | length 3846.2
  TopLayer w8: UApu1.113@9130.04,8631.38 9130,8810 9195,8875
  TopLayer w10: 9195,8875 11100,8875
  TopLayer w12: 11100,8875 12200,7775 UApu5.14@12200,7714.13 v1(12200,7660)
DPL12: UApu1.112 UApu5.15 | length 3749.7
  TopLayer w8: UApu1.112@9149.72,8631.38 9149.68,8799.68 9200,8850
  TopLayer w10: 9200,8850 11075,8850
  TopLayer w12: 11075,8850 12150,7775 UApu5.15@12150,7714.13 v1(12150,7660)
DPL13: UApu1.111 UApu5.16 | length 3653.3
  TopLayer w8: UApu1.111@9169.41,8631.38 9169.37,8789.37 9205,8825
  TopLayer w10: 9205,8825 11050,8825
  TopLayer w12: 11050,8825 12100,7775 UApu5.16@12100,7714.13 v1(12100,7660)
DPL14: UApu1.110 UApu5.17 | length 3556.9
  TopLayer w8: UApu1.110@9189.09,8631.38 9189.06,8779.06 9210,8800
  TopLayer w10: 9210,8800 11025,8800
  TopLayer w12: 11025,8800 12050,7775 UApu5.17@12050,7714.13 v1(12050,7660)
DPL15: UApu1.109 UApu5.18 | length 3460.4
  TopLayer w8: UApu1.109@9208.78,8631.38 9208.78,8768.78 9215,8775
  TopLayer w10: 9215,8775 11000,8775
  TopLayer w12: 11000,8775 12000,7775 UApu5.18@12000,7714.13 v1(12000,7660)
DS0*: UApu10.13 VME-BUS/J1.A13 | length 797.3
  TopLayer w12: v1(11655,6895) UApu10.13@11709.13,6895
  MidLayer1 w12: VME-BUS/J1.A13@11570,6210 11620,6260 11620,6660 11610,6670 11610,6875 11630,6895 v1(11655,6895)
DS0*PL: UApu1.98 UApu10.7 | length 3493.3
  TopLayer w8: UApu1.98@9279.65,8363.66 11091.63,8363.66
  TopLayer w10: 11091.63,8363.66 11500,7955.29 11500,7040 v1(11405,6945)
  TopLayer w12: UApu10.7@11350.87,6945 v1(11405,6945)
DS1*: UApu10.11 VME-BUS/J1.A12 | length 686.8
  TopLayer w12: v1(11655,6795) UApu10.11@11709.13,6795
  MidLayer1 w12: v1(11655,6795) 11655,6730 11720,6665 11720,6260 VME-BUS/J1.A12@11670,6210
DS1*PL: UApu1.99 UApu10.9 | length 3634.6
  TopLayer w8: UApu1.99@9279.65,8383.35 11100.23,8383.35
  TopLayer w10: 11100.23,8383.35 11520,7963.58 11520,6960 v1(11405,6845)
  TopLayer w12: UApu10.9@11350.87,6845 v1(11405,6845)
DTACK: UApu10.18 VME-BUS/J1.A16 | length 1157
  TopLayer w12: 11350.87,7195 v1(11405,7195)
  MidLayer1 w12: VME-BUS/J1.A16@11270,6210 11320,6260 11320,6525 11455,6660 11455,7180 11440,7195 v1(11405,7195)
FQUARTZ: UApu1.35 UG1.3 UG2.2 | length 1072.4
  TopLayer w10: 8340,7855 8375,7890 ; 8376.22,7891.22 UApu1.35@8448.94,7891.22
  TopLayer w12: UG1.3@7640,7496.02 7984.29,7496.02 8034.29,7546.02 UG2.2@8034.29,7596.02 8034.29,7639.29 8080,7685 8250,7685 8340,7775 8340,7855

## Text inside footprints (layer, text, board x,y; h text height)
C4_Conv_Ch3: Mechanical3 "CEL-SMD300" at 11370,10884.49 h20 r270
C4_Conv_Ch4: Mechanical3 "CEL-SMD300" at 11310,9684.49 h20 r270
C4_Conv_Ch5: Mechanical3 "CEL-SMD300" at 10450,10884.49 h20 r270
C4_Conv_Ch6: Mechanical3 "CEL-SMD300" at 10390,9684.49 h20 r270
C4_Conv_Ch7: Mechanical3 "CEL-SMD300" at 9330,10884.49 h20 r270
C4_Conv_Ch8: Mechanical3 "CEL-SMD300" at 9270,9684.49 h20 r270
C4_Conv_Ch9: Mechanical3 "CEL-SMD300" at 7510,10884.49 h20 r270
C4_Conv_Ch10: Mechanical3 "CEL-SMD300" at 7450,9684.49 h20 r270
C4_Conv_Ch11: Mechanical3 "CEL-SMD300" at 6390,10884.49 h20 r270
C4_Conv_Ch12: Mechanical3 "CEL-SMD300" at 6330,9684.49 h20 r270
C4_Conv_Ch13: Mechanical3 "CEL-SMD300" at 5470,10884.49 h20 r270
C4_Conv_Ch14: Mechanical3 "CEL-SMD300" at 5410,9684.49 h20 r270
C4_Conv_Ch15: Mechanical3 "CEL-SMD300" at 4350,10884.49 h20 r270
C4_Conv_Ch16: Mechanical3 "CEL-SMD300" at 4290,9684.49 h20 r270
C5_Conv_Ch1: Mechanical3 "CHIP0805" at 12450,11409.49 h20 r270
C5_Conv_Ch2: Mechanical3 "CHIP0805" at 12390,10209.49 h20 r270
C5_Conv_Ch3: Mechanical3 "CHIP0805" at 11330,11409.49 h20 r270
C5_Conv_Ch4: Mechanical3 "CHIP0805" at 11270,10209.49 h20 r270
C5_Conv_Ch5: Mechanical3 "CHIP0805" at 10410,11409.49 h20 r270
C5_Conv_Ch6: Mechanical3 "CHIP0805" at 10350,10209.49 h20 r270
C5_Conv_Ch7: Mechanical3 "CHIP0805" at 9290,11409.49 h20 r270
C5_Conv_Ch8: Mechanical3 "CHIP0805" at 9230,10209.49 h20 r270
C5_Conv_Ch9: Mechanical3 "CHIP0805" at 7470,11409.49 h20 r270
C5_Conv_Ch10: Mechanical3 "CHIP0805" at 7410,10209.49 h20 r270
C5_Conv_Ch11: Mechanical3 "CHIP0805" at 6350,11409.49 h20 r270
C5_Conv_Ch12: Mechanical3 "CHIP0805" at 6290,10209.49 h20 r270
C5_Conv_Ch13: Mechanical3 "CHIP0805" at 5430,11409.49 h20 r270
C5_Conv_Ch14: Mechanical3 "CHIP0805" at 5370,10209.49 h20 r270
C5_Conv_Ch15: Mechanical3 "CHIP0805" at 4310,11409.49 h20 r270
C5_Conv_Ch16: Mechanical3 "CHIP0805" at 4250,10209.49 h20 r270
CApu1: Mechanical3 "CHIP0805" at 8254.29,7966.02 h20 r180
CApu2: Mechanical3 "CHIP0805" at 7794.29,7741.02 h20 r90
CApu3: Mechanical3 "CHIP0805" at 7719.29,8246.02 h20 r270
CApu4: Mechanical3 "CHIP0805" at 9159.29,8686.02 h20 r90
CApu5: Mechanical3 "CHIP0805" at 8684.29,8686.02 h20 r90
CApu6: Mechanical3 "CHIP0805" at 8395,8085 h20 r180
CApu7: Mechanical3 "CHIP0805" at 9334.29,8011.02 h20
CApu8: Mechanical3 "CHIP0805" at 9059.29,7746.02 h20 r270
CApu9: Mechanical3 "CHIP0805" at 8585,7745 h20 r270
CApu10: Mechanical3 "CHIP0805" at 9069.29,8686.02 h20 r90
CApu11: Mechanical3 "CHIP0805" at 8769.29,8686.02 h20 r90
CApu12: Mechanical3 "CHIP0805" at 8979.29,7746.02 h20 r270
CApu13: Mechanical3 "CHIP0805" at 8675,7745 h20 r270
CApu14: Mechanical3 "CHIP0805" at 8395,8305 h20 r180
CApu15: Mechanical3 "CHIP0805" at 9335,8410 h20
CApu16: Mechanical3 "CHIP0805" at 8395,8480 h20 r180
Cgen: Mechanical3 "CHIP0805" at 7590,7975 h20 r270
Csup1: Mechanical3 "CHIP0805" at 9600,7040.26 h20
Csup2: Mechanical3 "CEL-SMD300" at 9266.52,7010.26 h20 r270
Csup3: Mechanical3 "CEL-SMD300" at 7833.93,6983.93 h20 r90
Csup4: Mechanical3 "CHIP0805" at 7993.93,6788.93 h20 r90
Csup5: Mechanical3 "CEL-SMD300" at 8558,6546.07 h20 r180
Csup6: Mechanical3 "CHIP0805" at 8270,6680 h20 r180
Csup7: Mechanical3 "CEL-SMD300" at 8630,7020 h20 r270
Csup8: Mechanical3 "CHIP0805" at 8840,7285 h20 r180
Csup9: Mechanical3 "CHIP0805" at 8973,6496.07 h20
Csup10: Mechanical3 "CHIP0805" at 9140,6580 h20
Csup11: Mechanical3 "CEL-SMD300" at 8405,7020 h20 r270
Csup12: Mechanical3 "CHIP0805" at 8220,7293 h20 r180
Csup13: Mechanical3 "CEL-SMD300" at 16105,6240 h20 r90
Csup14: Mechanical3 "CHIP0805" at 14410,6370 h20 r90
Csup15: Mechanical3 "CHIP0805" at 14810,6370 h20 r90
Csup16: Mechanical3 "CEL-SMD300" at 15305,6240 h20 r90
Csup17: Mechanical3 "CHIP0805" at 15615,6370 h20 r90
R1_Conv_Ch1: Mechanical3 "CHIP0805" at 12975,11459.49 h20 r180
R1_Conv_Ch2: Mechanical3 "CHIP0805" at 12915,10259.49 h20 r180
R1_Conv_Ch3: Mechanical3 "CHIP0805" at 11855,11459.49 h20 r180
R1_Conv_Ch4: Mechanical3 "CHIP0805" at 11795,10259.49 h20 r180
R1_Conv_Ch5: Mechanical3 "CHIP0805" at 10935,11459.49 h20 r180
R1_Conv_Ch6: Mechanical3 "CHIP0805" at 10875,10259.49 h20 r180
R1_Conv_Ch7: Mechanical3 "CHIP0805" at 9815,11459.49 h20 r180
R1_Conv_Ch8: Mechanical3 "CHIP0805" at 9755,10259.49 h20 r180
R1_Conv_Ch9: Mechanical3 "CHIP0805" at 7995,11459.49 h20 r180
R1_Conv_Ch10: Mechanical3 "CHIP0805" at 7935,10259.49 h20 r180
R1_Conv_Ch11: Mechanical3 "CHIP0805" at 6875,11459.49 h20 r180
R1_Conv_Ch12: Mechanical3 "CHIP0805" at 6815,10259.49 h20 r180
R1_Conv_Ch13: Mechanical3 "CHIP0805" at 5955,11459.49 h20 r180
R1_Conv_Ch14: Mechanical3 "CHIP0805" at 5895,10259.49 h20 r180
R1_Conv_Ch15: Mechanical3 "CHIP0805" at 4835,11459.49 h20 r180
R1_Conv_Ch16: Mechanical3 "CHIP0805" at 4775,10259.49 h20 r180
R2_Conv_Ch1: Mechanical3 "CHIP0805" at 12550,11490 h20 r90
R2_Conv_Ch2: Mechanical3 "CHIP0805" at 12490,10290 h20 r90
R2_Conv_Ch3: Mechanical3 "CHIP0805" at 11430,11490 h20 r90
R2_Conv_Ch4: Mechanical3 "CHIP0805" at 11370,10290 h20 r90
R2_Conv_Ch5: Mechanical3 "CHIP0805" at 10510,11490 h20 r90
R2_Conv_Ch6: Mechanical3 "CHIP0805" at 10450,10290 h20 r90
R2_Conv_Ch7: Mechanical3 "CHIP0805" at 9390,11490 h20 r90
R2_Conv_Ch8: Mechanical3 "CHIP0805" at 9330,10290 h20 r90
R2_Conv_Ch9: Mechanical3 "CHIP0805" at 7570,11490 h20 r90
R2_Conv_Ch10: Mechanical3 "CHIP0805" at 7510,10290 h20 r90
R2_Conv_Ch11: Mechanical3 "CHIP0805" at 6450,11490 h20 r90
R2_Conv_Ch12: Mechanical3 "CHIP0805" at 6390,10290 h20 r90
R2_Conv_Ch13: Mechanical3 "CHIP0805" at 5530,11490 h20 r90
R2_Conv_Ch14: Mechanical3 "CHIP0805" at 5470,10290 h20 r90
R2_Conv_Ch15: Mechanical3 "CHIP0805" at 4410,11490 h20 r90
R2_Conv_Ch16: Mechanical3 "CHIP0805" at 4350,10290 h20 r90
RApu1: Mechanical3 "CHIP0805" at 8174.29,8246.02 h20 r90
RApu2: Mechanical3 "CHIP0805" at 9563.9,8228.9 h20 r180
RApu3: Mechanical3 "CHIP0805" at 7819.29,8346.02 h20 r90
Rpu1: Mechanical3 "CHIP0805" at 9508.9,8128.9 h20
Rpu2: Mechanical3 "CHIP0805" at 9009.29,8326.02 h20 r180
Rpu3: Mechanical3 "CHIP0805" at 9009.29,8221.02 h20 r180
Rpu4: Mechanical3 "CHIP0805" at 9009.29,8121.02 h20 r180
Rvar1_Conv_Ch1: Mechanical3 "RVAR4" at 12900,10952.91 h20 r90
Rvar1_Conv_Ch2: Mechanical3 "RVAR4" at 12840,9752.91 h20 r90
Rvar1_Conv_Ch3: Mechanical3 "RVAR4" at 11780,10952.91 h20 r90
Rvar1_Conv_Ch4: Mechanical3 "RVAR4" at 11720,9752.91 h20 r90
Rvar1_Conv_Ch5: Mechanical3 "RVAR4" at 10860,10952.91 h20 r90
Rvar1_Conv_Ch6: Mechanical3 "RVAR4" at 10800,9752.91 h20 r90
Rvar1_Conv_Ch7: Mechanical3 "RVAR4" at 9740,10952.91 h20 r90
Rvar1_Conv_Ch8: Mechanical3 "RVAR4" at 9680,9752.91 h20 r90
Rvar1_Conv_Ch9: Mechanical3 "RVAR4" at 7920,10952.91 h20 r90
Rvar1_Conv_Ch10: Mechanical3 "RVAR4" at 7860,9752.91 h20 r90
Rvar1_Conv_Ch11: Mechanical3 "RVAR4" at 6800,10952.91 h20 r90
Rvar1_Conv_Ch12: Mechanical3 "RVAR4" at 6740,9752.91 h20 r90
Rvar1_Conv_Ch13: Mechanical3 "RVAR4" at 5880,10952.91 h20 r90
Rvar1_Conv_Ch14: Mechanical3 "RVAR4" at 5820,9752.91 h20 r90
Rvar1_Conv_Ch15: Mechanical3 "RVAR4" at 4760,10952.91 h20 r90
Rvar1_Conv_Ch16: Mechanical3 "RVAR4" at 4700,9752.91 h20 r90
SumIn_1: TopOverlay "6" at 11696.73,12194.13 h59.06; TopOverlay "9" at 12023.9,12194.13 h59.06; TopOverlay "5" at 12078.43,11824.06 h59.06; TopOverlay "1" at 11652.05,11824.06 h59.06